# EAGLE board 32 bit buffered shift register (EAGLE 6.5.0)
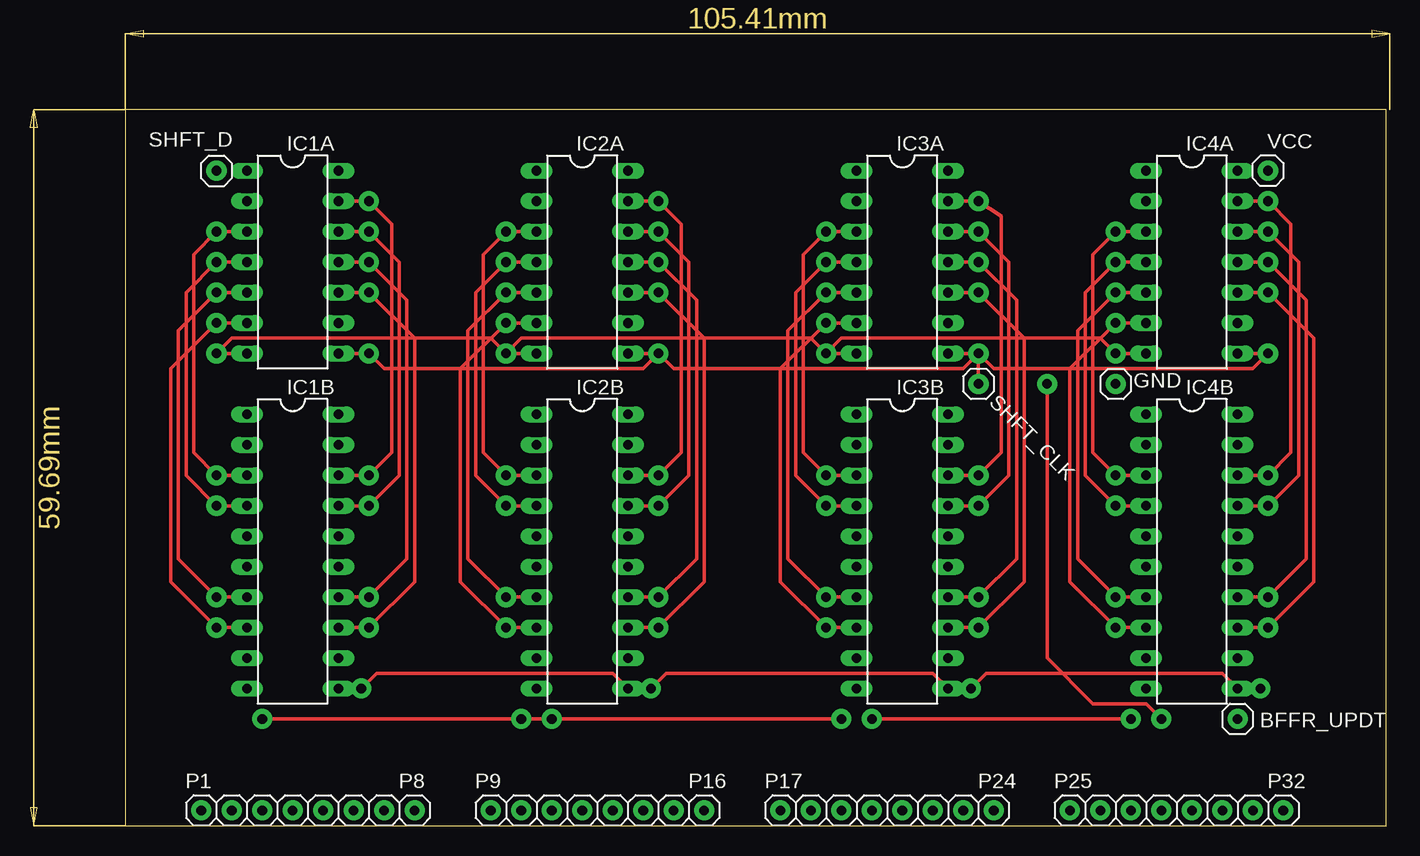
[diagram p0: board, top side]
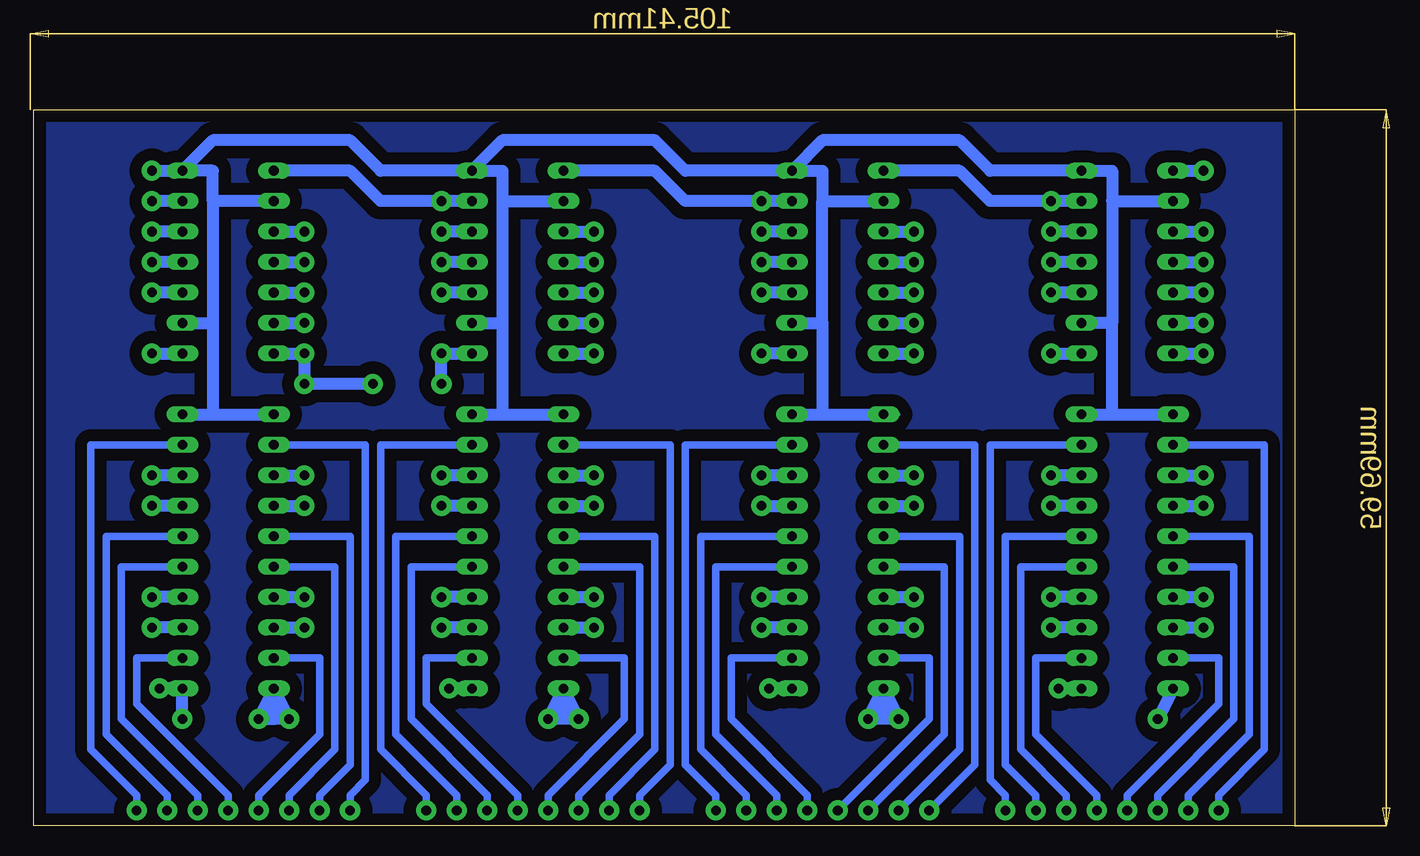
[diagram p1: board, bottom side, seen from below]

Size 105.08 x 59.68 mm. Coordinates in mm from the lower left corner, seen from the top.
Outline: 0,0 105.08,0 105.08,59.68 0,59.68 0,0
Copper layers (1*16): Top 0.035mm / dielectric 1.5mm / Bottom 0.035mm
Design rules "default": minimum track width 10mil, minimum drill 24mil, track to track 8mil, track to pad 8mil, pad to pad 8mil, via to via 8mil, smd to smd 8mil, copper to edge 40mil, drill to drill 8mil, minimum pad ring 10mil, minimum via ring 8mil, stop-mask expansion 4mil, vias tented up to drill 0mil, thermal gap 10mil

## Footprints (pad centres in the part's own frame; a part is rotated, then mirrored left to right if it is on the bottom)
1X01 = drill 0.8 pad 1.676: 1 0,0
DIL14 = drill 0.813 long: 1 -7.62,-3.81; 2 -5.08,-3.81; 3 -2.54,-3.81; 4 0,-3.81; 5 2.54,-3.81; 6 5.08,-3.81; 7 7.62,-3.81; 8 7.62,3.81; 9 5.08,3.81; 10 2.54,3.81; 11 0,3.81; 12 -2.54,3.81; 13 -5.08,3.81; 14 -7.62,3.81
DIL20 = drill 0.813 long: 1 -11.43,-3.81; 2 -8.89,-3.81; 3 -6.35,-3.81; 4 -3.81,-3.81; 5 -1.27,-3.81; 6 1.27,-3.81; 7 3.81,-3.81; 8 6.35,-3.81; 9 8.89,-3.81; 10 11.43,-3.81; 11 11.43,3.81; 12 8.89,3.81; 13 6.35,3.81; 14 3.81,3.81; 15 1.27,3.81; 16 -1.27,3.81; 17 -3.81,3.81; 18 -6.35,3.81; 19 -8.89,3.81; 20 -11.43,3.81

## Placement (x,y rotation side)
BFFR_UPDT  [1X01]  92.71,8.89 0 top
GND  [1X01]  82.55,36.83 0 top
IC1A  74HC164N  [DIL14]  13.97,46.99 270 top
IC1B  74273N  [DIL20]  13.97,22.86 270 top
IC2A  74HC164N  [DIL14]  38.1,46.99 270 top
IC2B  74273N  [DIL20]  38.1,22.86 270 top
IC3A  74HC164N  [DIL14]  64.77,46.99 270 top
IC3B  74273N  [DIL20]  64.77,22.86 270 top
IC4A  74HC164N  [DIL14]  88.9,46.99 270 top
IC4B  74273N  [DIL20]  88.9,22.86 270 top
P1  [1X01]  6.35,1.27 0 top
P2  [1X01]  8.89,1.27 0 top
P3  [1X01]  11.43,1.27 0 top
P4  [1X01]  13.97,1.27 0 top
P5  [1X01]  16.51,1.27 0 top
P6  [1X01]  19.05,1.27 0 top
P7  [1X01]  21.59,1.27 0 top
P8  [1X01]  24.13,1.27 0 top
P9  [1X01]  30.48,1.27 0 top
P10  [1X01]  33.02,1.27 0 top
P11  [1X01]  35.56,1.27 0 top
P12  [1X01]  38.1,1.27 0 top
P13  [1X01]  40.64,1.27 0 top
P14  [1X01]  43.18,1.27 0 top
P15  [1X01]  45.72,1.27 0 top
P16  [1X01]  48.26,1.27 0 top
P17  [1X01]  54.61,1.27 0 top
P18  [1X01]  57.15,1.27 0 top
P19  [1X01]  59.69,1.27 0 top
P20  [1X01]  62.23,1.27 0 top
P21  [1X01]  64.77,1.27 0 top
P22  [1X01]  67.31,1.27 0 top
P23  [1X01]  69.85,1.27 0 top
P24  [1X01]  72.39,1.27 0 top
P25  [1X01]  78.74,1.27 0 top
P26  [1X01]  81.28,1.27 0 top
P27  [1X01]  83.82,1.27 0 top
P28  [1X01]  86.36,1.27 0 top
P29  [1X01]  88.9,1.27 0 top
P30  [1X01]  91.44,1.27 0 top
P31  [1X01]  93.98,1.27 0 top
P32  [1X01]  96.52,1.27 0 top
SHFT_CLK  [1X01]  71.12,36.83 0 top
SHFT_D  [1X01]  7.62,54.61 90 top
VCC  [1X01]  95.25,54.61 270 top

## Library data of the parts
BFFR_UPDT GND P1-P32 SHFT_CLK SHFT_D VCC = pinhead
IC1A IC1B IC2A IC2B IC3A IC3B IC4A IC4B = 74xx-us

## Nets
GND: GND.1 IC1A.7 IC1B.10 IC2A.7 IC2B.10 IC3A.7 IC3B.10 IC4A.7 IC4B.10
N$1: IC1B.2 P1.1
N$2: IC1B.5 P2.1
N$3: IC1B.6 P3.1
N$4: IC1B.9 P4.1
N$5: IC1B.12 P5.1
N$6: IC1B.15 P6.1
N$7: IC1B.16 P7.1
N$8: IC1B.19 P8.1
N$9: IC2B.2 P9.1
N$10: IC2B.5 P10.1
N$11: IC2B.6 P11.1
N$12: IC2B.9 P12.1
N$13: IC2B.12 P13.1
N$14: IC2B.15 P14.1
N$15: IC2B.16 P15.1
N$16: IC2B.19 P16.1
N$17: IC3B.2 P17.1
N$18: IC3B.5 P18.1
N$19: IC3B.6 P19.1
N$20: IC3B.9 P20.1
N$21: IC3B.12 P21.1
N$22: IC3B.15 P22.1
N$23: IC3B.16 P23.1
N$24: IC3B.19 P24.1
N$25: IC4B.2 P25.1
N$26: IC4B.5 P26.1
N$27: IC4B.6 P27.1
N$28: IC4B.9 P28.1
N$29: IC4B.12 P29.1
N$30: IC4B.15 P30.1
N$31: IC4B.16 P31.1
N$32: IC4B.19 P32.1
N$33: IC1A.3 IC1B.3
N$34: IC1A.4 IC1B.4
N$35: IC1A.5 IC1B.7
N$36: IC1A.6 IC1B.8
N$37: IC1A.10 IC1B.13
N$38: IC1A.11 IC1B.14
N$39: IC1A.12 IC1B.17
N$40: IC1A.13 IC1B.18 IC2A.1
N$41: IC2A.3 IC2B.3
N$42: IC2A.4 IC2B.4
N$43: IC2A.5 IC2B.7
N$44: IC2A.6 IC2B.8
N$45: IC2A.10 IC2B.13
N$46: IC2A.11 IC2B.14
N$48: IC2A.13 IC2B.18 IC3A.1
N$49: IC3A.3 IC3B.3
N$50: IC3A.4 IC3B.4
N$51: IC3A.5 IC3B.7
N$52: IC3A.6 IC3B.8
N$53: IC3A.10 IC3B.13
N$54: IC3A.11 IC3B.14
N$55: IC3A.12 IC3B.17
N$56: IC3A.13 IC3B.18 IC4A.1
N$57: IC4A.3 IC4B.3
N$58: IC4A.4 IC4B.4
N$59: IC4A.5 IC4B.7
N$60: IC4A.6 IC4B.8
N$61: IC4A.10 IC4B.13
N$62: IC4A.11 IC4B.14
N$63: IC4A.12 IC4B.17
N$64: IC4A.13 IC4B.18
N$70: BFFR_UPDT.1 IC1B.11 IC2B.11 IC3B.11 IC4B.11
N$71: IC1A.1 SHFT_D.1
N$76: IC1A.8 IC2A.8 IC3A.8 IC4A.8 SHFT_CLK.1
N$85: IC2A.12 IC2B.17
VCC: IC1A.2 IC1A.9 IC1A.14 IC1B.1 IC1B.20 IC2A.2 IC2A.9 IC2A.14 IC2B.1 IC2B.20 IC3A.2 IC3A.9 IC3A.14 IC3B.1 IC3B.20 IC4A.2 IC4A.9 IC4A.14 IC4B.1 IC4B.20 VCC.1

## Tracks (layer width: path | path; a pad name or v marks a point on that pad's centre or on a via)
GND  (via drill 0.8 pad 1.68)
  Top 0.305: v11.43,8.89 v33.02,8.89 v35.56,8.89 v59.69,8.89 | v62.23,8.89 v83.82,8.89 | v86.36,8.89 85.09,10.16 80.64,10.16 76.83,13.97 v76.83,36.83 | IC1A.7 v7.62,39.37 8.89,40.64 30.48,40.64 v31.75,39.37 | IC2A.7 v31.75,39.37 | v31.75,39.37 33.02,40.64 57.15,40.64 v58.42,39.37 | v58.42,39.37 59.69,40.64 81.28,40.64 82.55,39.37 IC4A.7 | IC3A.7 v58.42,39.37
  Bottom 1.016: IC4A.7 82.55,39.37 GND.1 v76.83,36.83 | v59.69,8.89 IC3B.10 v62.23,8.89 | v35.56,8.89 IC2B.10 v33.02,8.89 | v35.56,8.89 34.29,10.16 v33.02,8.89 | v33.02,8.89 v35.56,8.89 | v86.36,8.89 IC4B.10 v83.82,8.89 85.09,8.89 | v62.23,8.89 60.96,10.16 v59.69,8.89 | v59.69,8.89 v62.23,8.89 | v86.36,8.89 85.09,10.16 85.09,8.89 | v86.36,8.89 85.09,8.89 | IC2A.7 v31.75,39.37 | IC1A.7 v7.62,39.37 | IC3A.7 v58.42,39.37 | IC1B.10 v11.43,8.89
N$1
  Bottom 0.61: P1.1 6.35,2.54 2.54,6.35 2.54,31.75 IC1B.2
N$2
  Bottom 0.61: P2.1 8.89,2.54 3.81,7.62 3.81,24.13 IC1B.5
N$3
  Bottom 0.61: P3.1 11.43,2.54 5.08,8.89 5.08,21.59 IC1B.6
N$4
  Bottom 0.61: P4.1 13.97,2.54 6.35,10.16 6.35,13.97 IC1B.9
N$5
  Bottom 0.61: IC1B.12 21.59,13.97 21.59,7.62 16.51,2.54 P5.1
N$6
  Bottom 0.61: IC1B.15 22.86,21.59 22.86,6.35 19.05,2.54 P6.1
N$7
  Bottom 0.61: IC1B.16 24.13,24.13 24.13,5.08 21.59,2.54 P7.1
N$8
  Bottom 0.61: P8.1 24.13,2.54 25.4,3.81 25.4,31.75 IC1B.19
N$9
  Bottom 0.61: P9.1 26.67,5.08 26.67,31.75 IC2B.2
N$10
  Bottom 0.61: P10.1 27.94,6.35 27.94,24.13 IC2B.5
N$11
  Bottom 0.61: P11.1 29.21,7.62 29.21,21.59 IC2B.6
N$12
  Bottom 0.61: P12.1 30.48,8.89 30.48,13.97 IC2B.9
N$13
  Bottom 0.61: P13.1 40.64,2.54 46.99,8.89 46.99,13.97 IC2B.12
N$14
  Bottom 0.61: P14.1 43.18,2.54 48.26,7.62 48.26,21.59 IC2B.15
N$15
  Bottom 0.61: P15.1 45.72,2.54 49.53,6.35 49.53,24.13 IC2B.16
N$16
  Bottom 0.61: P16.1 48.26,2.54 50.8,5.08 50.8,31.75 IC2B.19
N$17
  Bottom 0.61: P17.1 54.61,2.54 52.07,5.08 52.07,31.75 IC3B.2
N$18
  Bottom 0.61: P18.1 57.15,2.54 53.34,6.35 53.34,24.13 IC3B.5
N$19
  Bottom 0.61: P19.1 59.69,2.54 54.61,7.62 54.61,21.59 IC3B.6
N$20
  Bottom 0.61: P20.1 62.23,2.54 55.88,8.89 55.88,13.97 IC3B.9
N$21
  Bottom 0.61: P21.1 64.77,2.54 72.39,10.16 72.39,13.97 IC3B.12
N$22
  Bottom 0.61: P22.1 67.31,2.54 73.66,8.89 73.66,21.59 IC3B.15
N$23
  Bottom 0.61: P23.1 69.85,2.54 74.93,7.62 74.93,24.13 IC3B.16
N$24
  Bottom 0.61: P24.1 72.39,2.54 76.2,6.35 76.2,31.75 IC3B.19
N$25
  Bottom 0.61: P25.1 78.74,2.54 77.47,3.81 77.47,31.75 IC4B.2
N$26
  Bottom 0.61: P26.1 81.28,2.54 78.74,5.08 78.74,24.13 IC4B.5
N$27
  Bottom 0.61: P27.1 83.82,2.54 80.01,6.35 80.01,21.59 IC4B.6
N$28
  Bottom 0.61: P28.1 86.36,2.54 81.28,7.62 81.28,13.97 IC4B.9
N$29
  Bottom 0.61: IC4B.12 96.52,13.97 96.52,10.16 88.9,2.54 P29.1
N$30
  Bottom 0.61: P30.1 91.44,2.54 97.79,8.89 97.79,21.59 IC4B.15
N$31
  Bottom 0.61: P31.1 93.98,2.54 99.06,7.62 99.06,24.13 IC4B.16
N$32
  Bottom 0.61: IC4B.19 100.33,31.75 100.33,6.35 96.52,2.54 P32.1
N$33  (via drill 0.8 pad 1.68)
  Top 0.305: IC1B.3 v7.62,29.21 5.71,31.11 5.71,47.62 v7.62,49.53 IC1A.3
  Bottom 1.016: IC1B.3 v7.62,29.21 | IC1A.3 v7.62,49.53
N$34  (via drill 0.8 pad 1.68)
  Top 0.305: IC1B.4 v7.62,26.67 5.08,29.21 5.08,44.45 v7.62,46.99 IC1A.4
  Bottom 1.016: IC1B.4 v7.62,26.67 | IC1A.4 v7.62,46.99
N$35  (via drill 0.8 pad 1.68)
  Top 0.305: IC1A.5 v7.62,44.45 4.45,41.27 4.45,22.23 v7.62,19.05 IC1B.7
  Bottom 1.016: IC1B.7 v7.62,19.05 | v7.62,44.45 IC1A.5
N$36  (via drill 0.8 pad 1.68)
  Top 0.305: IC1A.6 v7.62,41.91 3.81,38.1 3.81,20.32 v7.62,16.51 IC1B.8
  Bottom 1.016: IC1B.8 v7.62,16.51 | v7.62,41.91 IC1A.6
N$37  (via drill 0.8 pad 1.68)
  Top 0.305: IC1A.10 v20.32,44.45 24.13,40.64 24.13,20.32 v20.32,16.51 IC1B.13
  Bottom 1.016: IC1B.13 v20.32,16.51 | IC1A.10 v20.32,44.45
N$38  (via drill 0.8 pad 1.68)
  Top 0.305: IC1A.11 v20.32,46.99 23.5,43.81 23.5,22.23 v20.32,19.05 IC1B.14
  Bottom 1.016: IC1B.14 v20.32,19.05 | IC1A.11 v20.32,46.99
N$39  (via drill 0.8 pad 1.68)
  Top 0.305: IC1A.12 v20.32,49.53 22.86,46.99 22.86,29.21 v20.32,26.67 IC1B.17
  Bottom 1.016: IC1B.17 v20.32,26.67 | IC1A.12 v20.32,49.53
N$40  (via drill 0.8 pad 1.68)
  Top 0.305: IC1A.13 v20.32,52.07 22.23,50.16 22.23,31.11 v20.32,29.21 IC1B.18
  Bottom 1.016: IC2A.1 27.94,54.61 25.4,52.07 v20.32,52.07 IC1A.13 | IC1B.18 v20.32,29.21
N$41  (via drill 0.8 pad 1.68)
  Top 0.305: IC2A.3 v31.75,49.53 29.84,47.62 29.84,31.11 v31.75,29.21 IC2B.3
  Bottom 1.016: IC2B.3 v31.75,29.21 | IC2A.3 v31.75,49.53
N$42  (via drill 0.8 pad 1.68)
  Top 0.305: IC2A.4 v31.75,46.99 29.21,44.45 29.21,29.21 v31.75,26.67 IC2B.4
  Bottom 1.016: IC2B.4 v31.75,26.67 | IC2A.4 v31.75,46.99
N$43  (via drill 0.8 pad 1.68)
  Top 0.305: IC2A.5 v31.75,44.45 28.57,41.27 28.57,22.23 v31.75,19.05 IC2B.7
  Bottom 1.016: IC2B.7 v31.75,19.05 | IC2A.5 v31.75,44.45
N$44  (via drill 0.8 pad 1.68)
  Top 0.305: IC2A.6 v31.75,41.91 27.94,38.1 27.94,20.32 v31.75,16.51 IC2B.8
  Bottom 1.016: IC2B.8 v31.75,16.51 | IC2A.6 v31.75,41.91
N$45  (via drill 0.8 pad 1.68)
  Top 0.305: IC2B.13 v44.45,16.51 48.26,20.32 48.26,40.64 v44.45,44.45
  Bottom 1.016: IC2B.13 v44.45,16.51 | IC2A.10 v44.45,44.45
N$46  (via drill 0.8 pad 1.68)
  Top 0.305: IC2B.14 v44.45,19.05 47.62,22.23 47.62,43.81 v44.45,46.99
  Bottom 1.016: IC2B.14 v44.45,19.05 | IC2A.11 v44.45,46.99
N$48  (via drill 0.8 pad 1.68)
  Top 0.305: v44.45,29.21 46.35,31.11 46.35,50.16 44.45,52.07 IC2A.13
  Bottom 1.016: IC2A.13 50.8,52.07 53.34,54.61 IC3A.1 | IC2B.18 v44.45,29.21
N$49  (via drill 0.8 pad 1.68)
  Top 0.305: IC3B.3 v58.42,29.21 56.52,31.11 56.52,47.62 v58.42,49.53
  Bottom 1.016: IC3B.3 v58.42,29.21 | IC3A.3 v58.42,49.53
N$50  (via drill 0.8 pad 1.68)
  Top 0.305: IC3B.4 v58.42,26.67 55.88,29.21 55.88,44.45 v58.42,46.99
  Bottom 1.016: IC3B.4 v58.42,26.67 | IC3A.4 v58.42,46.99
N$51  (via drill 0.8 pad 1.68)
  Top 0.305: IC3B.7 v58.42,19.05 55.24,22.23 55.24,41.27 v58.42,44.45
  Bottom 1.016: IC3B.7 v58.42,19.05 | IC3A.5 v58.42,44.45
N$52  (via drill 0.8 pad 1.68)
  Top 0.305: IC3B.8 v58.42,16.51 54.61,20.32 54.61,38.1 v58.42,41.91
  Bottom 1.016: IC3B.8 v58.42,16.51 | IC3A.6 v58.42,41.91
N$53  (via drill 0.8 pad 1.68)
  Top 0.305: IC3B.13 v71.12,16.51 74.93,20.32 74.93,40.64 v71.12,44.45
  Bottom 1.016: IC3B.13 v71.12,16.51 | IC3A.10 v71.12,44.45
N$54  (via drill 0.8 pad 1.68)
  Top 0.305: IC3B.14 v71.12,19.05 74.3,22.23 74.3,43.81 v71.12,46.99
  Bottom 1.016: IC3B.14 v71.12,19.05 | IC3A.11 v71.12,46.99
N$55  (via drill 0.8 pad 1.68)
  Top 0.305: IC3B.17 v71.12,26.67 73.66,29.21 73.66,46.99 v71.12,49.53
  Bottom 1.016: IC3B.17 v71.12,26.67 | IC3A.12 v71.12,49.53
N$56  (via drill 0.8 pad 1.68)
  Top 0.305: v71.12,29.21 73.03,31.11 73.03,50.8 71.12,52.07 IC3A.13
  Bottom 1.016: IC3A.13 76.2,52.07 78.74,54.61 IC4A.1 | IC3B.18 v71.12,29.21
N$57  (via drill 0.8 pad 1.68)
  Top 0.305: IC4B.3 v82.55,29.21 80.64,31.11 80.64,47.62 v82.55,49.53
  Bottom 1.016: IC4B.3 v82.55,29.21 | IC4A.3 v82.55,49.53
N$58  (via drill 0.8 pad 1.68)
  Top 0.305: IC4B.4 v82.55,26.67 80.01,29.21 80.01,44.45 v82.55,46.99
  Bottom 1.016: IC4B.4 v82.55,26.67 | IC4A.4 v82.55,46.99
N$59  (via drill 0.8 pad 1.68)
  Top 0.305: IC4B.7 v82.55,19.05 79.38,22.23 79.38,41.27 v82.55,44.45
  Bottom 1.016: IC4B.7 v82.55,19.05 | IC4A.5 v82.55,44.45
N$60  (via drill 0.8 pad 1.68)
  Top 0.305: IC4B.8 v82.55,16.51 78.74,20.32 78.74,38.1 v82.55,41.91
  Bottom 1.016: IC4B.8 v82.55,16.51 | IC4A.6 v82.55,41.91
N$61  (via drill 0.8 pad 1.68)
  Top 0.305: IC4B.13 v95.25,16.51 99.06,20.32 99.06,40.64 v95.25,44.45
  Bottom 1.016: IC4B.13 v95.25,16.51 | IC4A.10 v95.25,44.45
N$62  (via drill 0.8 pad 1.68)
  Top 0.305: IC4B.14 v95.25,19.05 98.42,22.23 98.42,43.81 v95.25,46.99
  Bottom 1.016: IC4B.14 v95.25,19.05 | IC4A.11 v95.25,46.99
N$63  (via drill 0.8 pad 1.68)
  Top 0.305: IC4B.17 v95.25,26.67 97.79,29.21 97.79,46.99 v95.25,49.53
  Bottom 1.016: IC4B.17 v95.25,26.67 | IC4A.12 v95.25,49.53
N$64  (via drill 0.8 pad 1.68)
  Top 0.305: IC4B.18 v95.25,29.21 97.16,31.11 97.16,50.16 v95.25,52.07
  Bottom 1.016: IC4B.18 v95.25,29.21 | IC4A.13 v95.25,52.07
N$65
  pour Bottom (isolate 1.016): 0,59.69 0,0 105.41,0 105.41,59.69
N$67  (via drill 0.8 pad 1.68)
  other vias: 82.55,39.37
N$70  (via drill 0.8 pad 1.68)
  Top 0.305: IC1B.11 v19.68,11.43 20.95,12.7 40.64,12.7 IC2B.11 v43.81,11.43 45.09,12.7 67.31,12.7 IC3B.11 v70.48,11.43 71.75,12.7 91.44,12.7 IC4B.11 | 93.98,11.43 IC4B.11 | IC4B.11 v94.61,11.43
  Bottom 1.016: BFFR_UPDT.1 IC4B.11 v94.61,11.43 | IC3B.11 v70.48,11.43 | IC2B.11 v43.81,11.43 | IC1B.11 v19.68,11.43
N$71
  Bottom 1.016: IC1A.1 SHFT_D.1
N$76  (via drill 0.8 pad 1.68)
  Top 0.305: IC1A.8 v20.32,39.37 21.59,38.1 43.18,38.1 v44.45,39.37 | v44.45,39.37 IC2A.8 | v44.45,39.37 45.72,38.1 69.85,38.1 v71.12,39.37 | IC4A.8 v95.25,39.37 93.98,38.1 72.39,38.1 v71.12,39.37 | IC3A.8 v71.12,39.37 | SHFT_CLK.1 v71.12,39.37
  Bottom 1.016: SHFT_CLK.1 v71.12,39.37 IC3A.8 | IC2A.8 v44.45,39.37 | v20.32,39.37 IC1A.8 | v95.25,39.37 IC4A.8
N$77
  Top 0.305: 58.42,46.99 60.96,46.99
N$78
  Top 0.305: 60.96,44.45 58.42,44.45
N$79
  Top 0.305: 58.42,41.91 60.96,41.91
N$80
  Top 0.305: 60.96,49.53 58.42,49.53
N$81
  Top 0.305: 41.91,49.53 44.45,49.53
N$82
  Top 0.305: 44.45,46.99 41.91,46.99
N$83  (via drill 0.8 pad 1.68)
  other vias: 44.45,52.07
N$84
  Top 0.305: 41.91,44.45 44.45,44.45
N$85  (via drill 0.8 pad 1.68)
  Top 0.305: IC2B.17 v44.45,26.67 46.99,29.21 46.99,46.99 v44.45,49.53
  Bottom 1.016: v44.45,26.67 IC2B.17 | IC2A.12 v44.45,49.53
N$86
  Top 0.305: 44.45,52.07 41.91,52.07
N$87
  Top 0.305: 68.58,49.53 71.12,49.53
N$88
  Top 0.305: 71.12,46.99 68.58,46.99
N$89
  Top 0.305: 68.58,44.45 71.12,44.45
N$90
  Top 0.305: 71.12,52.07 68.58,52.07
N$91
  Top 0.305: 82.55,46.99 85.09,46.99
N$92  (via drill 0.8 pad 1.68)
  other vias: 71.12,52.07
N$93
  Top 0.305: 85.09,44.45 82.55,44.45
N$94
  Top 0.305: 82.55,41.91 85.09,41.91
N$95
  Top 0.305: 85.09,49.53 82.55,49.53
N$96
  Top 0.305: 92.71,49.53 95.25,49.53
N$97
  Top 0.305: 95.25,46.99 92.71,46.99
N$98
  Top 0.305: 92.71,44.45 95.25,44.45
N$99
  Top 0.305: 95.25,52.07 92.71,52.07
N$100
  Top 0.305: 31.75,26.67 34.29,26.67
N$101
  Top 0.305: 34.29,19.05 31.75,19.05
N$102
  Top 0.305: 31.75,16.51 34.29,16.51
N$103
  Top 0.305: 34.29,29.21 31.75,29.21
N$104
  Top 0.305: 41.91,26.67 44.45,26.67
N$105
  Top 0.305: 44.45,19.05 41.91,19.05
N$106
  Top 0.305: 41.91,16.51 44.45,16.51
N$107
  Top 0.305: 44.45,29.21 41.91,29.21
N$108
  Top 0.305: 58.42,26.67 60.96,26.67
N$109
  Top 0.305: 60.96,19.05 58.42,19.05
N$110
  Top 0.305: 58.42,16.51 60.96,16.51
N$111
  Top 0.305: 60.96,29.21 58.42,29.21
N$112
  Top 0.305: 68.58,26.67 71.12,26.67
N$113
  Top 0.305: 71.12,19.05 68.58,19.05
N$114
  Top 0.305: 68.58,16.51 71.12,16.51
N$115
  Top 0.305: 71.12,29.21 68.58,29.21
N$116
  Top 0.305: 82.55,26.67 85.09,26.67
N$117
  Top 0.305: 85.09,19.05 82.55,19.05
N$118
  Top 0.305: 82.55,16.51 85.09,16.51
N$119
  Top 0.305: 85.09,29.21 82.55,29.21
N$120
  Top 0.305: 92.71,26.67 95.25,26.67
N$121
  Top 0.305: 95.25,19.05 92.71,19.05
N$122
  Top 0.305: 92.71,16.51 95.25,16.51
N$123
  Top 0.305: 95.25,29.21 92.71,29.21
VCC
  Bottom 0.305: 33.02,34.29 IC2B.1
  Bottom 1.016: IC2A.14 39.37,54.61 39.37,52.07 | IC3A.14 66.04,54.61 66.04,52.07 | 66.04,52.07 IC3A.2 | 39.37,52.07 IC2A.2 | IC4A.2 90.17,52.07 | 90.17,52.07 90.17,54.61 IC4A.14 | VCC.1 IC4A.14 | 15.24,52.07 15.24,54.61 IC1A.14 25.4,54.61 27.94,57.15 39.37,57.15 IC2A.14 | 15.24,52.07 IC1A.2 | 15.24,52.07 15.24,41.91 | 15.24,41.91 IC1A.9 | 39.37,41.91 39.37,52.07 | 66.04,52.07 66.04,41.91 | 90.17,52.07 90.17,41.91 | IC2A.14 50.8,54.61 53.34,57.15 66.04,57.15 IC3A.14 | IC3A.14 76.2,54.61 78.74,57.15 90.17,57.15 IC4A.14 | 15.24,34.29 IC1B.1 | IC2B.20 39.37,34.29 | 39.37,34.29 IC2B.1 | IC3B.20 66.04,34.29 | 66.04,34.29 IC3B.1 | IC4B.20 90.17,34.29 | 90.17,34.29 IC4B.1 | IC1B.20 15.24,34.29 | 15.24,34.29 15.24,41.91 | IC2A.9 39.37,41.91 | 39.37,41.91 39.37,34.29 | IC3A.9 66.04,41.91 | 66.04,41.91 66.04,34.29 | IC4A.9 90.17,41.91 | 90.17,41.91 90.17,34.29